# Altium PCB Therm_Expand_PCB_BottomBoard.PcbDoc (part 2 of 2)
Units mil, origin at the board's own origin, x right, y up, seen from the top; angles counter-clockwise.
Board outline 2696 x 1978 mil, 2 copper layers (Top Layer, Bottom Layer); 37 components, 59 nets, 206 pads, 124 vias.
Unrouted connection lines stored in the file: 20.
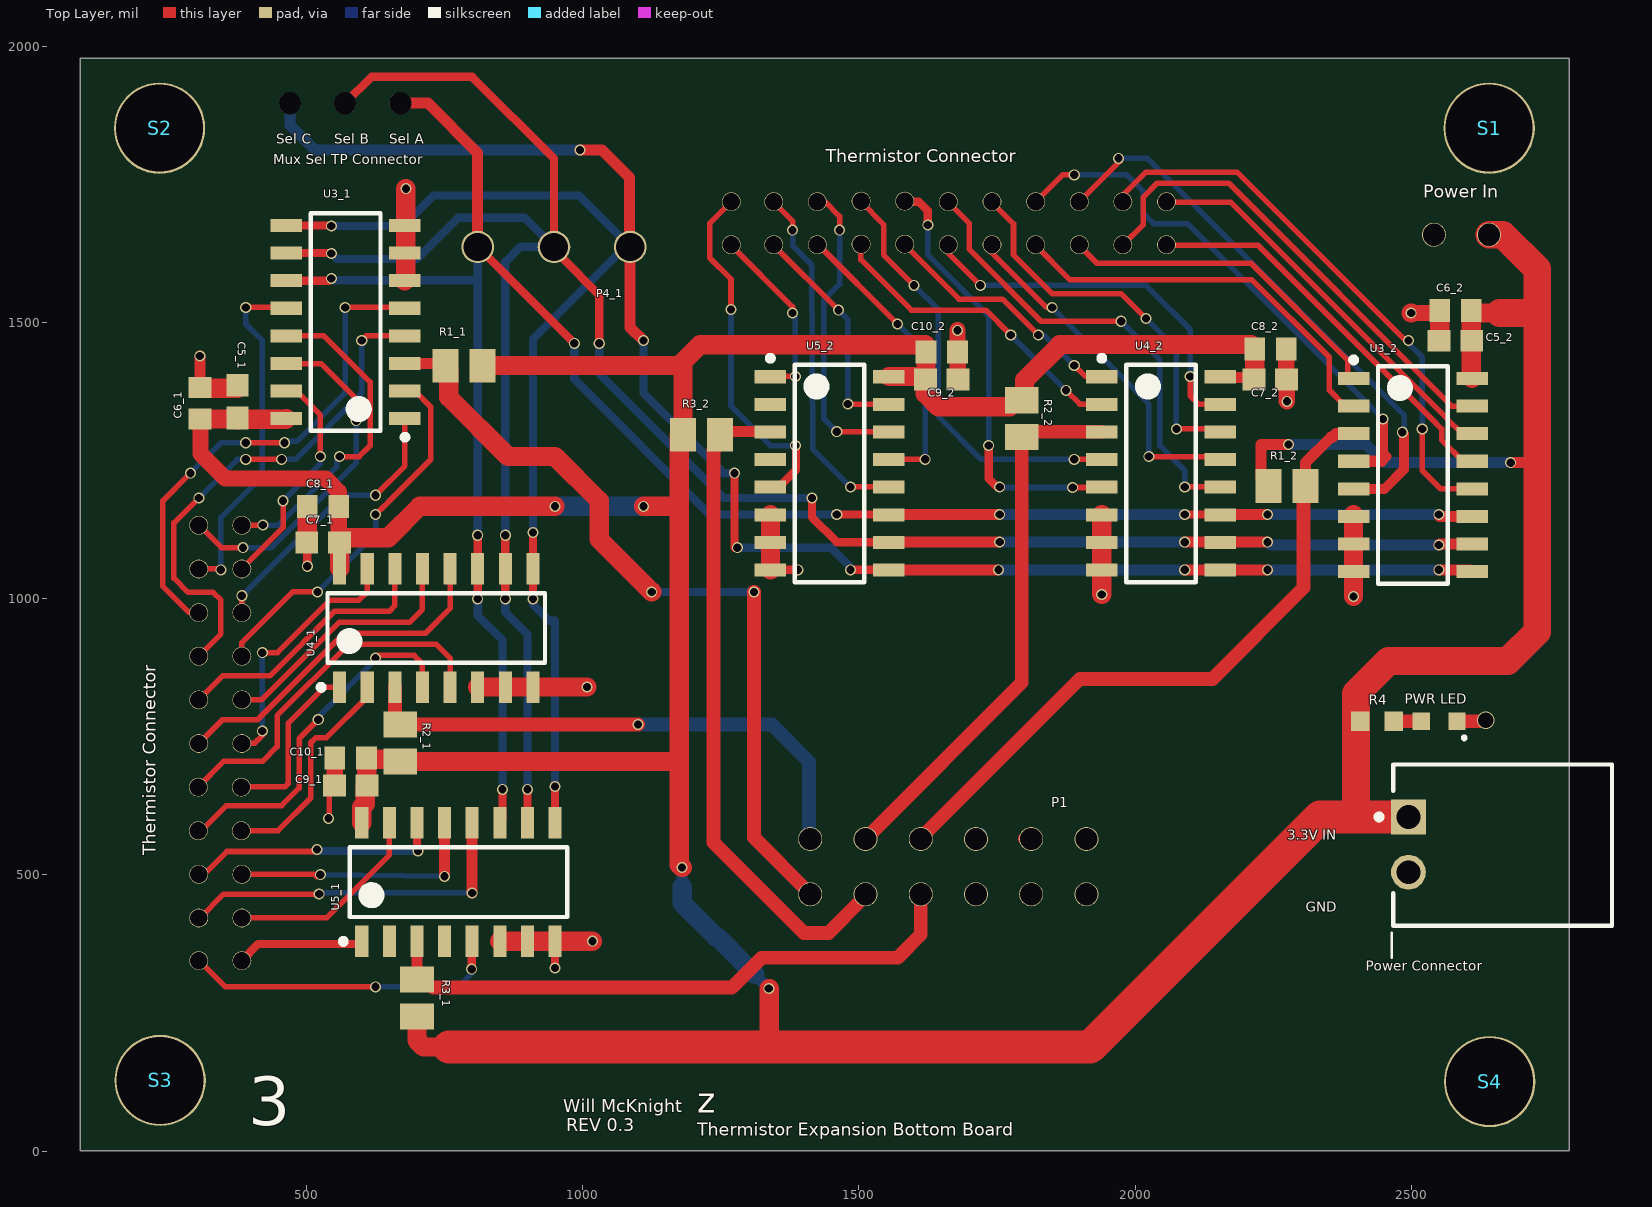
[diagram p0: Top Layer view]

## Via types
v1: diameter 20, hole 15, Top Layer to Bottom Layer, 104 vias
v2: diameter 20, hole 15, Top Layer to Bottom Layer, tented top, 19 vias
v3: diameter 32, hole 28, Top Layer to Bottom Layer, tented top, 1 vias

## Nets (pads, with @x,y where several pads share a name; then routed paths per layer and width w, separated by ;. In a path a pad name is that pad's centre, name@x,y a point inside that pad or via, vN(x,y) a via of type N, cw(c..) or ccw(c..) an arc to the next point about the centre after c; other vN are vias at no path point) (continued)
TS_IN22_2: (continued)
  Bottom Layer w10: v1(1268.54,1523.91) 1268.54,1348.91 1340,1277.45 v1(1385,1277.45)
pads on no net: "Mux Sel TP Connector.1" "Mux Sel TP Connector.2" "Mux Sel TP Connector.3" "Thermistor Connector.51"@1269,1641 P1.7 P1.8 P1.9 P1.10 P1.11 P1.12 U5_1.2 U5_1.4 U5_2.2 U5_2.4
copper on no net: | length 1608.2
  Top Layer w10: 1268.54,1640.02 1380,1528.56 v1(1380,1517.45) ; 1322.43,1402.45 1340,1402.45 v1(1385,1402.45)
  Top Layer w15: 948,1619.45 948,1637.45 ; 1085,1637.45 1086,1637.45 ; v1@1275,1092.45 v1(1280,1092.45) ; 1654.78,1152.45 1655,1152.67 ; v1@1750,1052.45 v1(1753,1052.45) ; v1(2550,1152.45) 2550,1150.54 v1@2551.54,1148.99
  Top Layer w20: 670,1897.45 720,1897.45 810,1807.45 810,1637.45 ; 945,1640.45 948,1637.45 ; v1(995,1812.45) 1035,1812.45 1085,1762.45 1085,1637.45 ; 1537,1102.45 1537.5,1102.95 ; v1(2550,1097.45) v1@2551.54,1098.99 ; 2606.57,1052.45 2610.02,1048.99
  Top Layer w25: 1801,565.45 1812,565.45 ; 1812,457.45 1812,465.45
  Bottom Layer w10: v1(1380,1517.45) 1385,1512.45 v1(1385,1402.45)
  Bottom Layer w15: v1(1485,1052.45) v1@1485,1057.45
  Bottom Layer w20: 470,1897.45 470,1857.45 515,1812.45 v1(995,1812.45) ; 1704,575.45 1722,575.45 ; v1@2089.5,1102.95 v1(2090,1102.45) ; v1(2240,1102.45) v1@2245,1097.45
  other v1: 2090,1052.45 2240,1052.45 2550,1052.45 1755,1102.95 1460,1152.45 1755,1152.45 2090,1152.45 2240,1152.45 1415,1182.45 1275,1227.45 985,1462.45 1030,1462.45 1110,1467.45

## Polygon pours and split planes (outlines as drawn)
AGND on Bottom Layer "AGND" (solid, remove dead copper, pour order 0): 2786,1979 90,1979 90,1 2786,1

## Silkscreen, mask and mechanical layers (free items; w line width, h text height)
Top Overlay:
  lines w4.92: 2465,350 2465,395
  text "Sel C" at 445,1817.45 h30
  text "Sel B" at 550,1817.45 h30
  text "Sel A" at 650,1817.45 h30
  text "PWR LED" at 2488,803.45 h30
  text "3.3V IN" at 2276,557.45 h30
  text "GND" at 2309,427.45 h30
  text "Will McKnight" at 965,62.45 h39.37
  text "z" at 1207,54.45 h78.74
  text "REV 0.3" at 970,27.45 h39.37
  text "Thermistor Expansion Bottom Board" at 1207,19.45 h39.37
  text "3" at 395,17.45 h150
Board Outline:
  lines w4.92: 2785.04,1979 90,1979 90,1 2786,1 2786,1979